# EAGLE board CT_schematic (EAGLE 7.6.0)

Size 100 x 80 mm. Coordinates in mm from the lower left corner, seen from the top.
Outline: 0,0 100,0 100,80 0,80 0,0
Copper layers (1*16): Top 0.035mm / dielectric 1.5mm / Bottom 0.035mm
Design rules "default": minimum track width 10mil, minimum drill 24mil, track to track 8mil, track to pad 8mil, pad to pad 8mil, via to via 8mil, smd to smd 8mil, copper to edge 40mil, drill to drill 8mil, minimum pad ring 10mil, minimum via ring 8mil, stop-mask expansion 4mil, vias tented up to drill 0mil, thermal gap 10mil

## Footprints (pad centres in the part's own frame; a part is rotated, then mirrored left to right if it is on the bottom)
C0603 = smd 0.8 x 0.8: 1 -0.762,0; 2 0.762,0
C0402 = smd 0.5 x 0.5: 1 -0.508,0; 2 0.508,0
C1210 = smd 1.2 x 2.5: 1 -1.524,0; 2 1.524,0
R0603 = smd 0.8 x 0.8: 1 -0.762,0; 2 0.762,0
EXV-9H = smd 3.505 x 1.676: 1 -2.857,0; 2 2.857,0
L0603 = smd 0.8 x 0.8: 1 -0.762,0; 2 0.762,0
L1210 = smd 1.2 x 2.5: 1 -1.524,0; 2 1.524,0
IND25X25CZ = smd 2.489 x 3.429: 1 -2.718,0; 2 2.718,0
PJ-037B_PACKAGE = drill 3.7 square: 1 12,0 | drill 3.2 square: 2 6,0
UFBGA100 = smd 0.28 x 0.28: A1 -2.75,2.75; A2 -2.25,2.75; A3 -1.75,2.75; A4 -1.25,2.75; A5 -0.75,2.75; A6 -0.25,2.75; A7 0.25,2.75; A8 0.75,2.75; A9 1.25,2.75; A10 1.75,2.75; A11 2.25,2.75; A12 2.75,2.75; B1 -2.75,2.25; B2 -2.25,2.25; B3 -1.75,2.25; B4 -1.25,2.25; B5 -0.75,2.25; B6 -0.25,2.25; B7 0.25,2.25; B8 0.75,2.25; B9 1.25,2.25; B10 1.75,2.25; B11 2.25,2.25; B12 2.75,2.25; C1 -2.75,1.75; C2 -2.25,1.75; C3 -1.75,1.75; C4 -1.25,1.75; C5 -0.75,1.75; C8 0.75,1.75; C9 1.25,1.75; C10 1.75,1.75; C11 2.25,1.75; C12 2.75,1.75; D1 -2.75,1.25; D2 -2.25,1.25; D3 -1.75,1.25; D10 1.75,1.25; D11 2.25,1.25; D12 2.75,1.25; E1 -2.75,0.75; E2 -2.25,0.75; E3 -1.75,0.75; E10 1.75,0.75; E11 2.25,0.75; E12 2.75,0.75; F1 -2.75,0.25; F2 -2.25,0.25; F11 2.25,0.25; F12 2.75,0.25; G1 -2.75,-0.25; G2 -2.25,-0.25; G11 2.25,-0.25; G12 2.75,-0.25; H1 -2.75,-0.75; H2 -2.25,-0.75; H3 -1.75,-0.75; H10 1.75,-0.75; H11 2.25,-0.75; H12 2.75,-0.75; J1 -2.75,-1.25; J2 -2.25,-1.25; J3 -1.75,-1.25; J10 1.75,-1.25; J11 2.25,-1.25; J12 2.75,-1.25; K1 -2.75,-1.75; K2 -2.25,-1.75; K3 -1.75,-1.75; K4 -1.25,-1.75; K5 -0.75,-1.75; K8 0.75,-1.75; K9 1.25,-1.75; K10 1.75,-1.75; K11 2.25,-1.75; K12 2.75,-1.75; L1 -2.75,-2.25; L2 -2.25,-2.25; L3 -1.75,-2.25; L4 -1.25,-2.25; L5 -0.75,-2.25; L6 -0.25,-2.25; L7 0.25,-2.25; L8 0.75,-2.25; L9 1.25,-2.25; L10 1.75,-2.25; L11 2.25,-2.25; L12 2.75,-2.25; M1 -2.75,-2.75; M2 -2.25,-2.75; M3 -1.75,-2.75; M4 -1.25,-2.75; M5 -0.75,-2.75; M6 -0.25,-2.75; M7 0.25,-2.75; M8 0.75,-2.75; M9 1.25,-2.75; M10 1.75,-2.75; M11 2.25,-2.75; M12 2.75,-2.75
SOIC-8 = smd 1.6 x 0.6: 1 -2.7,1.905 | smd 1.55 x 0.6: 2 -2.7,0.635; 3 -2.7,-0.635; 4 -2.7,-1.905; 5 2.7,-1.905; 6 2.7,-0.635; 7 2.7,0.635; 8 2.7,1.905
TST-110-05-T-D-RA = drill 1 pad 1.7 square: 1 0,0 | drill 1 pad 1.7: 2 0,2.54; 3 2.54,0; 4 2.54,2.54; 5 5.08,0; 6 5.08,2.54; 7 7.62,0; 8 7.62,2.54; 9 10.16,0; 10 10.16,2.54; 11 12.7,0; 12 12.7,2.54; 13 15.24,0; 14 15.24,2.54; 15 17.78,0; 16 17.78,2.54; 17 20.32,0; 18 20.32,2.54; 19 22.86,0; 20 22.86,2.54
SSOP-16 = smd 1.981 x 0.356: 1 -2.464,2.223; 2 -2.464,1.587; 3 -2.464,0.953; 4 -2.464,0.318; 5 -2.464,-0.318; 6 -2.464,-0.953; 7 -2.464,-1.587; 8 -2.464,-2.223; 9 2.464,-2.223; 10 2.464,-1.587; 11 2.464,-0.953; 12 2.464,-0.318; 13 2.464,0.318; 14 2.464,0.953; 15 2.464,1.587; 16 2.464,2.223
182-009-MALE = drill 1.194 pad 1.524 octagon: 1 -5.537,10.923; 2 -2.769,10.923; 3 0,10.923; 4 2.769,10.923; 5 5.537,10.923; 6 -4.153,8.08; 7 -1.384,8.08; 8 1.384,8.08; 9 4.153,8.08 | hole 3.048: -12.446,9.501; 12.446,9.501
ABS07-32.768KHZ-7-T = smd 1.1 x 2.4: 1 -2.5,0; 2 0,0
ASFL1 = smd 1.7 x 1.5: 1 -1.27,-1.1; 2 1.27,-1.1; 3 1.27,1.1; 4 -1.27,1.1
IR3899MTR1PBF = smd 0.25 x 0.75: 1 0,0; 2 0.5,0; 3 1,0; 4 1.5,0; 5 2,0; 6 2.5,0; 7 3,0 | smd 0.75 x 0.25: 8 3.425,0.78; 9 3.425,1.28; 10 3.425,1.78; 14 -0.425,1.78; 15 -0.425,1.28; 16 -0.425,0.78 | smd 0.3 x 1.95: 11 3.22,3.63 | smd 1.62 x 2.42: 12 1.786,3.8 | smd 1 x 1.95: 13 0.117,3.63 | smd 2.19 x 1.25: 17 1.51,1.26
SON-6 = smd 0.55 x 0.3: 1 -0.355,0.5 | smd 0.52 x 0.3: 2 -0.37,0; 3 -0.37,-0.5; 4 0.37,-0.5; 5 0.37,0; 6 0.37,0.5
SW_4-1437565-2 = smd 1.4 x 2.1: 1 -2.23,4.55; 2 -2.23,-4.55; 3 2.23,4.55; 4 2.23,-4.55
LGM67K-G1J2-24-Z = smd 0.8 x 1.4: A -2,0; C 0,0
NC7SZ125M5X = smd 1.3 x 0.7: 1 -1.3,0.95; 2 -1.3,0; 3 -1.3,-0.95; 4 1.3,-0.95; 5 1.3,0.95

## Placement (x,y rotation side)
C1  1e-06  [C0603]  -26.67,76.2 0 top  (outside the outline)
C2  1e-07  [C0603]  -30.48,76.2 0 top  (outside the outline)
C3  1e-07  [C0603]  -34.29,76.2 0 top  (outside the outline)
C4  1e-07  [C0603]  -38.1,76.2 0 top  (outside the outline)
C5  1e-07  [C0603]  -41.91,76.2 0 top  (outside the outline)
C6  4.7e-06  [C0603]  -15.24,76.2 0 top  (outside the outline)
C7  1e-07  [C0603]  -45.72,76.2 0 top  (outside the outline)
C8  1e-07  [C0603]  -49.53,76.2 0 top  (outside the outline)
C9  1e-07  [C0603]  -53.34,76.2 0 top  (outside the outline)
C10  1e-08  [C0603]  -57.15,76.2 0 top  (outside the outline)
C11  1e-06  [C0603]  -60.96,76.2 0 top  (outside the outline)
C12  1e-11  [C0402]  -45.72,81.28 0 top  (outside the outline)
C13  1e-11  [C0402]  -49.53,81.28 0 top  (outside the outline)
C14  1e-08  [C0402]  -53.34,81.28 0 top  (outside the outline)
C15  1e-07  [C0402]  -57.15,81.28 0 top  (outside the outline)
C16  1e-06  [C0603]  -64.77,76.2 0 top  (outside the outline)
C17  1e-06  [C0603]  -68.58,76.2 0 top  (outside the outline)
C18  2.2e-07  [C0603]  -19.05,76.2 0 top  (outside the outline)
C19  1e-06  [C0603]  -72.39,76.2 0 top  (outside the outline)
C20  1e-06  [C0603]  -76.2,76.2 0 top  (outside the outline)
C21  1e-08  [C0402]  -60.96,81.28 0 top  (outside the outline)
C22  1e-08  [C0402]  -64.77,81.28 0 top  (outside the outline)
C23  0.0001  [C1210]  -67.31,57.15 0 top  (outside the outline)
C24  2.2e-06  [C0603]  -22.86,76.2 0 top  (outside the outline)
C25  1e-07  [C0402]  -68.58,81.28 0 top  (outside the outline)
C26  1e-07  [C0402]  -72.39,81.28 0 top  (outside the outline)
C27  8.6971073877236e-09  [R0603]  -33.02,64.77 0 top  (outside the outline)
C28  2.9649229730876e-07  [R0603]  -43.18,64.77 0 top  (outside the outline)
C31  1e-07  [C0402]  -76.2,81.28 0 top  (outside the outline)
C32  0.0001  [EXV-9H]  -72.39,49.53 0 top  (outside the outline)
C33  0.0001  [EXV-9H]  -17.78,58.42 0 top  (outside the outline)
C34  1e-08  [C0402]  -15.24,86.36 0 top  (outside the outline)
C35  1e-08  [C0402]  -19.05,86.36 0 top  (outside the outline)
F1  240.0  [L0603]  -15.24,81.28 0 top  (outside the outline)
I1  1e-05  [L1210]  -73.66,57.15 0 top  (outside the outline)
I2  6.8e-07  [IND25X25CZ]  -27.94,58.42 0 top  (outside the outline)
J1  PJ-037B  [PJ-037B_PACKAGE]  -67.31,7.62 0 top  (outside the outline)
R2  1000.0  [R0603]  -19.05,81.28 0 top  (outside the outline)
R4  4700.0  [R0603]  -22.86,81.28 0 top  (outside the outline)
R5  2200.0  [R0603]  -26.67,81.28 0 top  (outside the outline)
R6  2200.0  [R0603]  -30.48,81.28 0 top  (outside the outline)
R7  10000.0  [R0603]  -30.48,71.12 0 top  (outside the outline)
R8  10000.0  [R0603]  -35.56,71.12 0 top  (outside the outline)
R9  10000.0  [R0603]  -40.64,71.12 0 top  (outside the outline)
R10  10000.0  [R0603]  -45.72,71.12 0 top  (outside the outline)
R11  10000.0  [R0603]  -50.8,71.12 0 top  (outside the outline)
R12  100000.0  [R0603]  -15.24,71.12 0 top  (outside the outline)
R13  10000.0  [R0603]  -55.88,71.12 0 top  (outside the outline)
R14  0.1  [R0603]  -34.29,81.28 0 top  (outside the outline)
R15  4030.2416170974  [R0603]  -50.8,64.77 0 top  (outside the outline)
R16  719.68600305311  [R0603]  -58.42,64.77 0 top  (outside the outline)
R17  58.613333333333  [R0603]  -66.04,64.77 0 top  (outside the outline)
R18  130.0  [R0603]  -38.1,81.28 0 top  (outside the outline)
R19  39000.0  [R0603]  -60.96,71.12 0 top  (outside the outline)
R20  49900.0  [R0603]  -66.04,71.12 0 top  (outside the outline)
R21  5147.5789473684  [R0603]  -73.66,64.77 0 top  (outside the outline)
R22  10000.0  [R0603]  -71.12,71.12 0 top  (outside the outline)
R23  10000.0  [R0603]  -76.2,71.12 0 top  (outside the outline)
R24  9100.0  [R0603]  -41.91,81.28 0 top  (outside the outline)
R25  680000.0  [R0603]  -20.32,71.12 0 top  (outside the outline)
R26  120000.0  [R0603]  -25.4,71.12 0 top  (outside the outline)
U1  stm32f091vch6  [UFBGA100]  -43.18,27.94 0 top  (outside the outline)
U2  AT25M01-SSHM-T  [SOIC-8]  -62.23,39.37 0 top  (outside the outline)
U3  TST-110-05-T-D-RA  [TST-110-05-T-D-RA]  -64.77,46.99 0 top  (outside the outline)
U4  LTC2804CGN-1#PBF  [SSOP-16]  -29.21,39.37 0 top  (outside the outline)
U5  182-009-113R531  [182-009-MALE]  -36.83,6.35 0 top  (outside the outline)
U6  M24M02-DRMN6TP  [SOIC-8]  -45.72,39.37 0 top  (outside the outline)
U7  ABS07-32.768KHZ-7-T  [ABS07-32.768KHZ-7-T]  -46.99,58.42 0 top  (outside the outline)
U8  ASFL1-25MHZ-NCS  [ASFL1]  -26.67,49.53 0 top  (outside the outline)
U9  IR3899MTR1PBF  [IR3899MTR1PBF]  -59.69,25.4 0 top  (outside the outline)
U10  TPS3895ADRYR  [SON-6]  -21.59,85.09 0 top  (outside the outline)
U11  4-1437565-2  [SW_4-1437565-2]  -27.94,27.94 0 top  (outside the outline)
U12  Q65110A2395  [LGM67K-G1J2-24-Z]  -55.88,57.15 0 top  (outside the outline)
U13  nc7sz125m5x  [NC7SZ125M5X]  -15.24,64.77 0 top  (outside the outline)
U14  nc7sz125m5x  [NC7SZ125M5X]  -21.59,64.77 0 top  (outside the outline)

## Library data of the parts
C1-C28 C31-C35 F1 I1 I2 J1 R2 R4-R26 U1-U14 = circuit_tree

## Nets
CLK_CRYSTAL_U1_D1: C12.1 U1.D1 U7.1
CLK_CRYSTAL_U1_E1: C13.1 U1.E1 U7.2
CLK_U1_F1: U1.F1 U8.3
GND: C1.2 C2.2 C3.2 C4.2 C5.2 C6.2 C7.2 C8.2 C9.2 C10.2 C11.2 C12.2 C13.2 C14.2 C15.2 C16.2 C17.2 C19.2 C20.2 C21.2 C22.2 C24.2 C25.2 C26.2 C31.2 C32.2 C33.2 C34.2 C35.2 J1.2 R2.2 R7.2 R13.2 R14.1 R14.2 R16.2 R19.2 R21.2 R24.2 R26.2 U1.D3 U1.F11 U1.F12 U1.K1 U2.4 U3.4 U3.6 U3.8 U3.10 U3.12 U3.14 U3.16 U3.18 U3.20 U4.8 U5.5 U6.4 U8.2 U9.4 U9.11 U9.17 U10.2 U12.C U13.2 U13.3 U14.1 U14.3
NET_U1_A3: R5.1 U1.A3 U6.6
NET_U1_A4: R7.1 U1.A4
NET_U1_B3: R6.1 U1.B3 U6.5
NET_U1_H2: R4.1 U1.H2 U14.4
NET_U1_M1: C10.1 C11.1 F1.1 U1.M1
NET_U1_M11: U12.A
NET_U1_M12: U11.3 U11.4
NET_U2_3: R8.1 U2.3
NET_U2_7: R10.1 U2.7
NET_U4_6: C16.1 U4.6
NET_U4_7: C18.1 I1.2 U4.7
NET_U4_9: C17.1 U4.9
NET_U4_10: C18.2 U4.10
NET_U4_11: R12.1 U4.11
NET_U5_2: U4.1 U5.2
NET_U5_3: U4.3 U5.3
NET_U5_7: U4.2 U5.7
NET_U5_8: U4.4 U5.8
NET_U6_3: R13.1 U6.3
NET_U9_1: C27.1 R15.1 R16.1 R17.1 R18.1 U9.1 U9.8
NET_U9_2: C26.1 U9.2
NET_U9_3: C27.2 C28.1 C28.2 U9.3
NET_U9_5: R19.1 U9.5
NET_U9_10: C24.1 U9.10
NET_U9_12: C23.1 I2.1 U9.12
NET_U9_13: U9.13
NET_U9_14: C23.2 U9.14
NET_U9_15: R20.1 R21.1 U9.15
NET_U9_ATNET_3: I2.2 R15.2
NET_U9_ATNET_4: C28.2 R17.2
NET_U9_ATNET_5: R18.2
NET_U10_1: R23.1 R24.1 U10.1
NET_U10_3: R25.2 R26.1 U10.3
NET_U10_4: R22.1 U10.4 U13.4 U14.2
NET_U11_1: R2.1 U11.1 U11.2
PROC_SPI1_MISO: U1.A7 U2.2
PROC_SPI1_MOSI: U1.C5 U2.5
PROC_SPI1_NSS: R9.1 U1.A9 U2.1
PROC_SPI1_SCK: U1.A8 U2.6
PROC_SYS_SWCLK: U1.A10 U3.9
PROC_SYS_SWDIO: U1.A11 U3.7
PROC_USART1_CTS: U4.13
PROC_USART1_RTS: U4.15
PROC_USART1_RX: U4.16
PROC_USART1_TX: U4.14
RST_OUT_U3_SRESET_B: R11.1 U3.15 U13.1
VCC_S1_16V8: C25.1 C32.1 C33.1 J1.1 R20.2 U9.9
VCC_TIER1_3V3: C1.1 C2.1 C3.1 C4.1 C5.1 C6.1 C7.1 C8.1 C9.1 C14.1 C15.1 C19.1 C20.1 C21.1 C22.1 C31.1 C34.1 C35.1 F1.2 I1.1 I2.2 R4.2 R5.2 R6.2 R8.2 R9.2 R10.2 R11.2 R12.2 R15.2 R22.2 R23.2 R25.1 U1.C4 U1.E2 U1.G11 U1.G12 U1.H3 U2.8 U3.1 U4.5 U4.12 U6.8 U8.4 U10.6 U13.5 U14.5

## Tracks (layer width: path | path; a pad name or v marks a point on that pad's centre or on a via)
CLK_CRYSTAL_U1_D1  (2 unrouted)
CLK_CRYSTAL_U1_E1  (2 unrouted)
CLK_U1_F1  (1 unrouted)
GND  (66 unrouted)
NET_U1_A3  (2 unrouted)
NET_U1_A4  (1 unrouted)
NET_U1_B3  (2 unrouted)
NET_U1_H2  (2 unrouted)
NET_U1_M1  (3 unrouted)
NET_U1_M12  (1 unrouted)
NET_U2_3  (1 unrouted)
NET_U2_7  (1 unrouted)
NET_U4_6  (1 unrouted)
NET_U4_7  (2 unrouted)
NET_U4_9  (1 unrouted)
NET_U4_10  (1 unrouted)
NET_U4_11  (1 unrouted)
NET_U5_2  (1 unrouted)
NET_U5_3  (1 unrouted)
NET_U5_7  (1 unrouted)
NET_U5_8  (1 unrouted)
NET_U6_3  (1 unrouted)
NET_U9_1  (6 unrouted)
NET_U9_2  (1 unrouted)
NET_U9_3  (3 unrouted)
NET_U9_5  (1 unrouted)
NET_U9_10  (1 unrouted)
NET_U9_12  (2 unrouted)
NET_U9_14  (1 unrouted)
NET_U9_15  (2 unrouted)
NET_U9_ATNET_3  (1 unrouted)
NET_U9_ATNET_4  (1 unrouted)
NET_U10_1  (2 unrouted)
NET_U10_3  (2 unrouted)
NET_U10_4  (3 unrouted)
NET_U11_1  (2 unrouted)
PROC_SPI1_MISO  (1 unrouted)
PROC_SPI1_MOSI  (1 unrouted)
PROC_SPI1_NSS  (2 unrouted)
PROC_SPI1_SCK  (1 unrouted)
PROC_SYS_SWCLK  (1 unrouted)
PROC_SYS_SWDIO  (1 unrouted)
RST_OUT_U3_SRESET_B  (2 unrouted)
VCC_S1_16V8  (5 unrouted)
VCC_TIER1_3V3  (46 unrouted)